# Altium PCB CoolerUI-BotPCB.PcbDoc
Units mm, origin at the board's own origin, x right, y up, seen from the top; angles counter-clockwise.
Board outline 53.5 x 52.8 mm, 2 copper layers (Top Layer, Bottom Layer); 19 components, 17 nets, 69 pads, 8 vias.
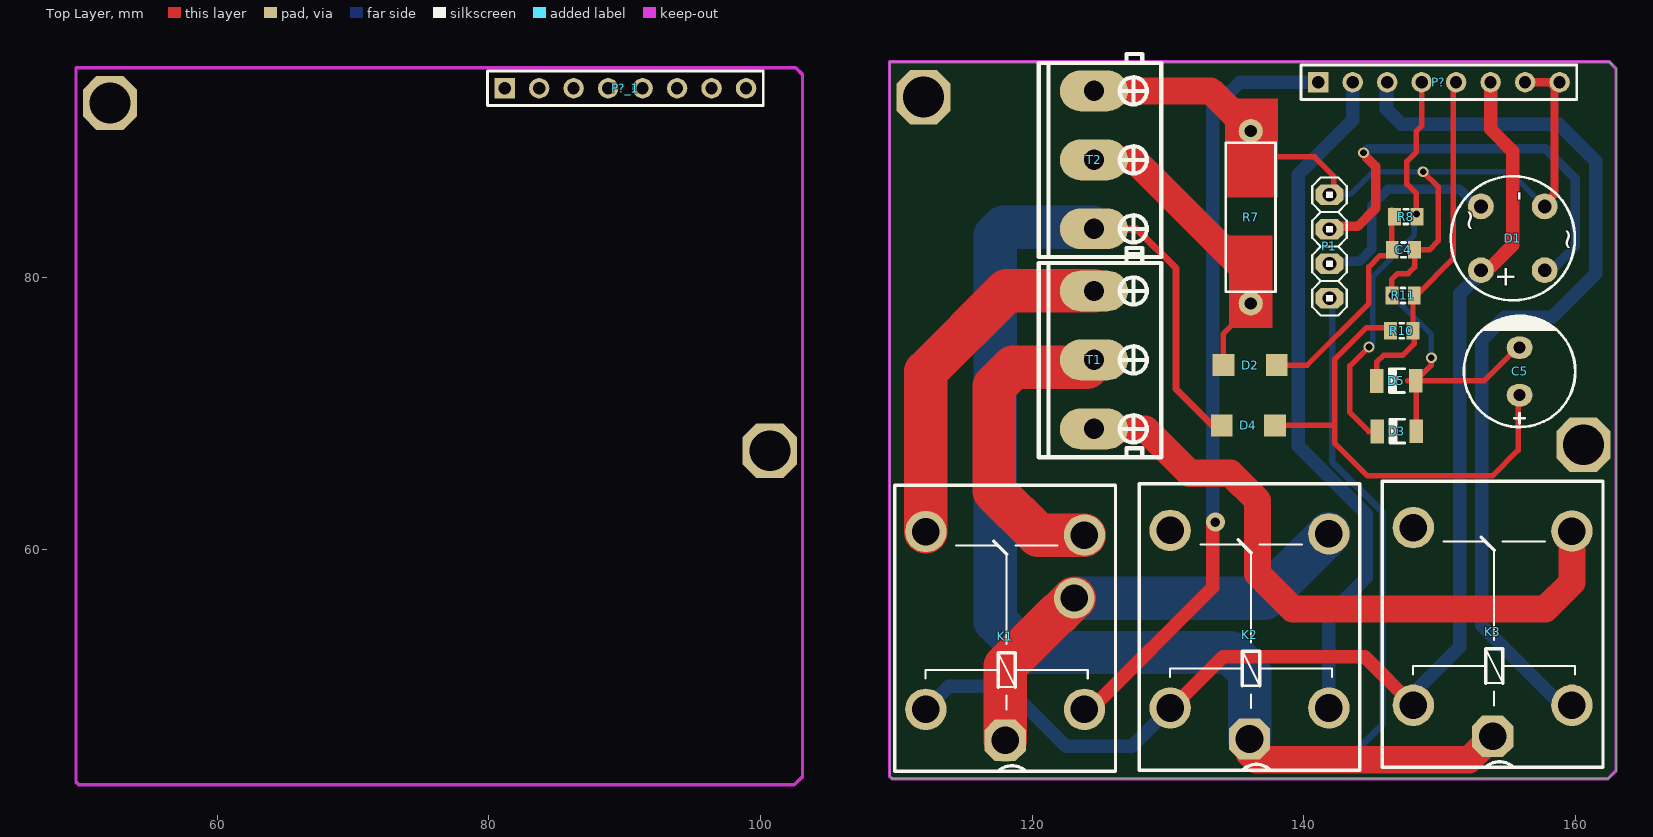
[diagram p0: Top Layer view]
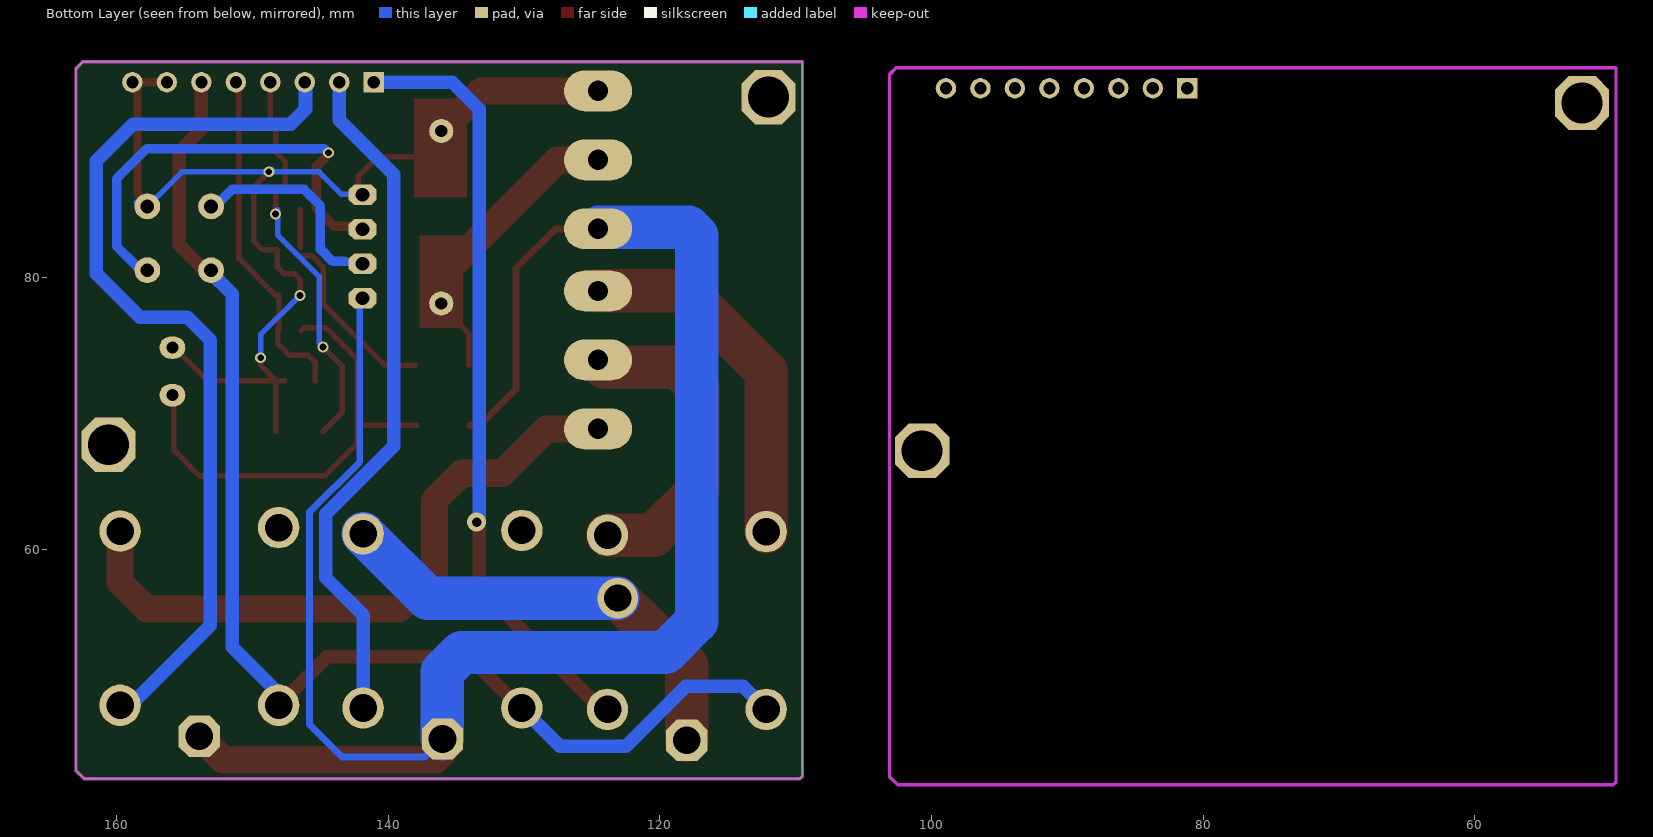
[diagram p1: Bottom Layer view, seen from below]

## Layer stack, top to bottom
Top Solder: solder mask 0.0102, Solder Resist, Dk 3.5
Top Layer: signal copper 0.0356
Dielectric1: dielectric 0.32, FR-4, Dk 4.8
Bottom Layer: signal copper 0.0356
Bottom Solder: solder mask 0.0102, Solder Resist, Dk 3.5

## Board outline
162.4,43.1 163,43.7 163,95.4 162.5,95.9 109.5,95.9 109.5,43.3 109.7,43.1

## Design rules (kind name [scope] priority, off if disabled: settings)
Clearance Clearance_2 [InPolygon] p1: gap=0.8
Clearance Clearance_1 [(OnLayer('Keep-Out Layer'))] p2: gap=0
Clearance [All] p3: gap=0.2
ComponentClearance [All] p1 off: gap=0.254 collisioncheckmode=3 verticalgap=0.254 showdistances=FALSE
HoleSize [All] p1: absolutevalues=TRUE maxlimit=5 minlimit=0.025 maxpercent=80.000 minpercent=20.000
MinimumSolderMaskSliver [All] p1 off: minsoldermaskwidth=0.254
PolygonConnect [All] p1: connectstyle=Relief reliefconductorwidth=0.254 reliefentries=4 polygonreliefangle="90 Angle" airgapwidth=0.254
RoutingVias [All] p1: holewidth=0.5 width=0.8 viastyle="Through Hole" minholewidth=0.5 minwidth=0.8 maxholewidth=0.5 maxwidth=0.8
SilkToSilkClearance [All] p1 off: silktosilkclearance=0.254
SilkToSolderMaskClearance [IsPad] p1 off: minsilkscreentomaskgap=0.254 clearancetoexposedcopper=TRUE
SolderMaskExpansion [All] p1: expansion=0.102
Width [All] p1: maxlimit=5 minlimit=0.1 preferedwidth=0.3
24 further rules are at their usual default settings.

## Classes and differential pairs
component class CoolerUI-BotPCB: C4 C5 D1 D2 D3 D4 D5 K1 K2 K3 P1 P? R7 R8 R10 R11 T1 T2

## Components (designator, comment, footprint, x,y, rotation, side; value= is the part's Value field where it differs from the comment)
C4 "100nF" SMD_CAP_0805 148.171,82.049 r180 top
C5 "470uf" "cap 03" 155.9,73.1 r270 top
D1 "Diode Bridge" Bridge 155.4,82.9 r90 top
D2 "1n4001-7 SMD" "DO-214AC ( SMD Diode )" 138.019,73.563 r180 top
D3 "Diode Zener SMD" DIOMELF3615N 146.9,68.7 r0 top
D4 "1n4001-7 SMD" "DO-214AC ( SMD Diode )" 137.892,69.118 r180 top
D5 "Diode Zener SMD" DIOMELF3615N 146.874,72.42 r0 top
K1 "Relay-SPDT" My_rel 118,52.9 r180 top
K2 "Relay-SPDT" My_rel 136,53 r180 top
K3 "Relay-SPDT" My_rel 153.9,53.2 r180 top
P1 "Header 4" My_1X04 141.9,82.3 r90 top
P? "Header 8" HDR1X8 141.067,94.391 r0 top
P?_1 "Header 8" HDR1X8 81.157,93.954 r0 top (schematic designator P?)
R7 "Jumper" Res-(1/1) 136.1,78.1 r90 top
R8 "10k" "RES 0805 (2012X06L)" 146.7,84.5 r0 top
R10 "470k" "RES 0805 (2012X06L)" 146.4,76.1 r0 top
R11 "10k" "RES 0805 (2012X06L)" 146.494,78.693 r0 top
T1 "TER3" TER3 124.557,79.024 r90 top
T2 "TER3" TER3 124.557,93.756 r90 top

## Footprints (in the part's own frame and the unit in brackets; to place one, negate y for a bottom-side part, rotate by r counter-clockwise, add the part's x,y. Pads: shape width x height; smd on the part's side, far side on the other; paste and mask are expansions set on the pad)
Bridge [mm]
  round 1.905 hole 1.016: 1(-2.35,2.35) 2(-2.35,-2.35) 3(2.35,-2.35) 4(2.35,2.35)
  silkscreen extent -4.57,-4.57 4.57,4.57, body extent -3.92,-4.06 4.18,4.04, height 5.21
"cap 03" [mil]
  oval 65x75 hole 35: 1(68.9,0) 2(-68.9,0)
  silkscreen extent -161,-161 161,161, body extent -159,-159 157,158, height 473
DIOMELF3615N [mm] "MELF Diode, 2-Leads, Body 3.6x1.5mm, IPC Medium Density"
  rect 1x1.75 smd: 1(-1.495,-0.03) 2(1.38,-0.005)
  silkscreen extent -0.55,-0.87 0.55,0.88, body extent -1.61,-0.83 1.54,0.67, height 1.45
"DO-214AC ( SMD Diode )" [mm]
  rect 1.6x1.6 smd: 0(3.93,0) 1(0,0)
  body extent -0.55,-1.3 4.45,1.4, height 2.15
HDR1X8 [mm] "Connector; Header; 8 Position"
  rect 1.5x1.5 hole 0.9: 1(0,0)
  round 1.5 hole 0.9: 2(2.54,0) 3(5.08,0) 4(7.62,0) 5(10.16,0) 6(12.7,0) 7(15.24,0) 8(17.78,0)
  silkscreen extent -1.27,-1.27 19.05,1.27
My_1X04 [mil]
  oct 60x80 hole 40: 1(-150,0) 2(-50,0) 3(50,0) 4(150,0)
  silkscreen extent -200,-50 200,50
My_rel [mil]
  oct 120x120 hole 80: 1(-0.5,274.5)
  round 120 hole 80: 2(-230.5,-320.5) 3(229.5,-330.5) 4(-230.5,184.5) 5(229.5,184.5)
  silkscreen extent -321,-466 320,365
"RES 0805 (2012X06L)" [mm] "Chip Resistor, 2-Leads, Body 2.0x1.3mm, IPC High Density _ (0.100 W)"
  rect 0.95x1.3 smd: 1(0,0) 2(1.65,0)
  silkscreen extent 0.67,-0.55 0.97,0.55, body extent -0.19,-0.63 1.84,0.64, height 0.6
Res-(1/1) [mil]
  round 70 hole 35: 1(0,0) 2(500,0)
  silkscreen extent 34,-72 466,72, body extent -11,-71 514,73, height 151
SMD_CAP_0805 [mm]
  rect 0.95x1.3 smd: 1(0,0) 2(1.65,0)
  silkscreen extent 0.67,-0.55 0.97,0.55, body extent -0.19,-0.63 1.84,0.63, height 0.65
TER3 [mm]
  oval 3x5 hole 1.5: 1(0,0) 2(-5.08,0) 3(-10.16,0)
  silkscreen extent -12.24,-4.95 2.72,4.06

## Part data
C4: library part Cap-Bipolar, "Bipolar Capacitor"
C5: library part Cap-Polar, "Polar Capacitor"
D1: "Full Wave Diode Bridge"
K1 K2 K3: "standard single contact relay"
P1: "Header, 4-Pin"
P? P?_1: "Header, 8-Pin"
R7 R8 R10 R11: library part Resistor, "Resistor"

## Free pads (board coordinates)
  oct 4x4 hole 3: 0(52.09,92.863) 0(100.69,67.263) 0(112,93.3) 0(160.6,67.7)

## Via types
v1: diameter 0.8, hole 0.5, Top Layer to Bottom Layer, 6 vias
v2: diameter 3, hole 2, Top Layer to Bottom Layer, 1 vias
v3: diameter 1.4, hole 0.7, Top Layer to Bottom Layer, 1 vias

## Nets (pads, with @x,y where several pads share a name; then routed paths per layer and width w, separated by ;. In a path a pad name is that pad's centre, name@x,y a point inside that pad or via, vN(x,y) a via of type N, cw(c..) or ccw(c..) an arc to the next point about the centre after c; other vN are vias at no path point)
AC+: D4.0 K2.1 K3.1 P1.1 T2.3 | length 145.8
  Top Layer w0.5: T2.3 127.704,83.596 130.6,80.7 130.6,71.8 133.282,69.118 D4.0
  Top Layer w2: K2.1@136.013,44.913 K2.1 ; K2.1@136.05,44.95 136.5,44.5 152.185,44.5 K3.1
  Bottom Layer w0.5: K2.1 137.34,44.7 143.4,44.7 145.8,47.1 145.8,62.743 142.1,66.443 P1.1@142.1,78.406
  Bottom Layer w2: T2.3@124.453,83.7 T2.3
  Bottom Layer w3.2: T2.3@124.453,83.7 117.9,83.7 117.3,83.1 117.3,54.7 119.6,52.4 134.6,52.4 136.013,50.987 K2.1
AC-: C4.1 C5.2 D1.3 D3.2 D5.2 P1.4 P?.7 P?.8 R7.2 R11.1 T2.1 | length 87.1
  Top Layer w0.4: R7.2 138,88.9 140.8,88.9 142.21,87.49 P1.4@142.21,86.136 ; R11.1 146.494,79.894 146.9,80.3 147.7,80.3 148.171,80.771 C4.1 149.249,82.049 149.9,82.7 149.9,86.7 v1(148.8,87.8) ; 147.654,72.415 153.315,72.415 C5.2@155.8,74.9 ; D3.2 148.28,72.389 D5.2 149.4,73.561 v1(149.4,74.1)
  Top Layer w0.6: P?.7 P?.8 ; D1.3@157.5,85.2 158.468,86.168 158.468,94.023 P?.8@158.1,94.391
  Top Layer w2: T2.1 133.144,93.756 R7.2 136.1,88.5 136.2,88.4
  Bottom Layer w0.4: P1.4@142.21,86.136 143.436,86.136 145.1,87.8 148.4,87.8 v1@148.6,88 ; v1(146.5,78.699) 149.4,75.799 v1(149.4,74.1) ; v1(148.8,87.8) 155.2,87.8 157.45,85.55 D1.3@158.55,85.55
ACN: D2.0 R7.1 T2.2 | length 22.5
  Top Layer w0.4: D2.0 134.089,75.889 136.1,77.9 R7.1
  Top Layer w2: T2.2 127.524,88.676 136.1,80.1 R7.1
AMPERADC: D3.1 P?.4 R8.2 | length 28.9
  Top Layer w0.4: 144.5,74.6 143.4,73.5 143.4,70.075 144.805,68.67 ; R8.2@148.3,84.65 148.3,86.187 147.6,86.887 147.6,88.563 148.3,89.263 148.3,90.8 148.687,91.187 P?.4
  Bottom Layer w0.4: v1(144.8,74.9) 145.1,75.2 145.1,80.1 148.15,83.15 v1@148.15,85
  other v1: 148.3,84.7
FAST: K1.2 T1.2 | length 23.9
  Top Layer w2: T1.2@124.013,73.4 T1.2
  Top Layer w3.2: K1.2 120.459,61.041 117.2,64.3 117.2,72 118.6,73.4 T1.2@124.013,73.4
"FAST TRIG": K1.4 P?.1 | length 56.9
  Top Layer w1: K1.4@123.8,48.268 124.368,48.268 133.3,57.2 v3@133.3,62.1
  Bottom Layer w1: v3@133.3,62.2 133.3,92.4 135.291,94.391 P?.1
  other v3: 133.5,62
NetC4_2: C4.2 D2.1 R8.1 | length 16.2
  Top Layer w0.4: D2.1 140.263,73.563 144.8,78.1 144.8,80.8 145.628,81.628 C4.2@146.5,81.628 ; C4.2@146.5,82.228 R8.1@146.5,85
NetC5_1: C5.1 D4.1 R10.1 | length 35.1
  Top Layer w0.4: D4.1 142.182,69.118 142.3,69 ; R10.1 146.2,76.3 144.6,76.3 142.3,74 142.3,67.8 144.7,65.4 153.9,65.4 155.8,67.3 C5.1@155.8,71.35
NetD1_2: D1.2 P1.3 | length 31.9
  Top Layer w0.4: P1.3@142.21,83.596 P1.3@142.407,83.793 ; v1@144.3,89.2 v1@144.6,88.9
  Top Layer w0.7: P1.3@142.407,83.793 143.993,83.793 145.3,85.1 145.3,88.2 v1@144.6,88.9
  Bottom Layer w0.7: v1(144.4,89.2) 144.7,89.5 157.8,89.5 160,87.3 160,82.3 D1.2@158.55,80.85
NetD1_4: D1.4 P1.2 | length 15.7
  Bottom Layer w0.4: P1.2@142.21,81.056 143.056,81.056 143.2,81.2
  Bottom Layer w0.7: 143.2,81.2 144.1,81.2 145,82.1 145,85.3 146.2,86.5 151.5,86.5 D1.4@153.1,84.9
NetK1_1: K1.1 K2.2 | length 33.3
  Top Layer w3.2: K1.1 118.013,51.387 121.925,55.3 122,55.3 v2(123.1,56.4)
  Bottom Layer w3.2: v2(123.1,56.4) 137.114,56.4 K2.2
PUMP: K3.2 T1.3 | length 48.5
  Top Layer w2: T1.3 128.336,68.864 131.6,65.6 134.6,65.6 136.6,63.6 136.6,58.2 139.2,55.6 157.8,55.6 159.755,57.555 K3.2
"PUMP TRIG": K3.4 P?.3 | length 67.8
  Bottom Layer w1: P?.3 146.1,94.344 146.1,92.4 147.2,91.3 158.8,91.3 161.5,88.6 161.5,80.3 158.3,77.1 154.8,77.1 153.1,75.4 153.1,54.4 158.986,48.514 K3.4
SLOW: K1.3 T1.1 | length 26.6
  Top Layer w3.2: K1.3 112.171,73.071 118.124,79.024 T1.1
"SLOW TRIG": K2.4 P?.2 | length 50.9
  Bottom Layer w1: K2.4 141.855,55.155 144.6,57.9 144.6,62.6 139.6,67.6 139.6,87.6 143.607,91.607 P?.2
V12ND: D1.1 K1.5 K2.5 K3.5 P?.6 | length 91.5
  Top Layer w1: K2.5@130.286,48.314 134.073,52.1 144.484,52.1 K3.5 ; P?.6 153.767,90.933 155.4,89.3 155.4,82.4 D1.1@153.85,80.85
  Bottom Layer w1: K1.5 113.857,49.9 118.1,49.9 122.5,45.5 127.357,45.5 K2.5 ; K3.5 148.071,49.371 151.5,52.8 151.5,78.8 D1.1@153.2,80.5
VOLTAGEADC: D5.1 P?.5 R10.2 R11.2 | length 25.2
  Top Layer w0.4: D5.1 145.379,73.779 145.9,74.3 147.3,74.3 148.144,75.144 R10.2@148.144,76.1 ; R10.2 148.05,78.599 R11.2 ; R11.2@148.293,78.693 151,81.4 151,94.164 P?.5
pads on no net: K2.3 K3.3 P?_1.1 P?_1.2 P?_1.3 P?_1.4 P?_1.5 P?_1.6 P?_1.7 P?_1.8
copper on no net: | length 0.4
  Top Layer w0.4: 91.09,93.727 91.317,93.954
  Bottom Layer w1: 86.19,93.907 86.237,93.954

## Keep-outs
Keep-Out Layer:
  lines w0.254: 49.59,42.863 49.59,95.463 102.59,95.463 103.09,94.963 103.09,43.263 102.49,42.663 50.09,42.663 49.79,42.663 49.59,42.863 ; 109.5,43.3 109.7,43.1 110,43.1 162.4,43.1 163,43.7 163,95.4 162.5,95.9 109.5,95.9 109.5,43.3

## Other copper
Top Layer:
  region net ACN: 134.5,83.1 134.5,76.3 137.7,76.3 137.7,83.1
  region net AC-: 134.2,93.2 134.2,85.9 138.1,85.9 138.1,93.2

## Text inside footprints (layer, text, board x,y; h text height)
D1: Top Overlay "-" at 156.454,85.623 h1.5 r90; Top Overlay "+" at 155.552,79.202 h1.5 r90; Top Overlay "~" at 160.114,81.958 h1.5 r90; Top Overlay "~" at 152.911,83.332 h1.5 r90